# Altium PCB VESC_POWER_74mm.PcbDoc
Units mm, origin at the board's own origin, x right, y up, seen from the top; angles counter-clockwise.
Board outline 69 x 54 mm, 2 copper layers (Top Layer, Bottom Layer), stack 1.58 mm thick; 47 components, 16 nets, 109 pads, 0 vias.
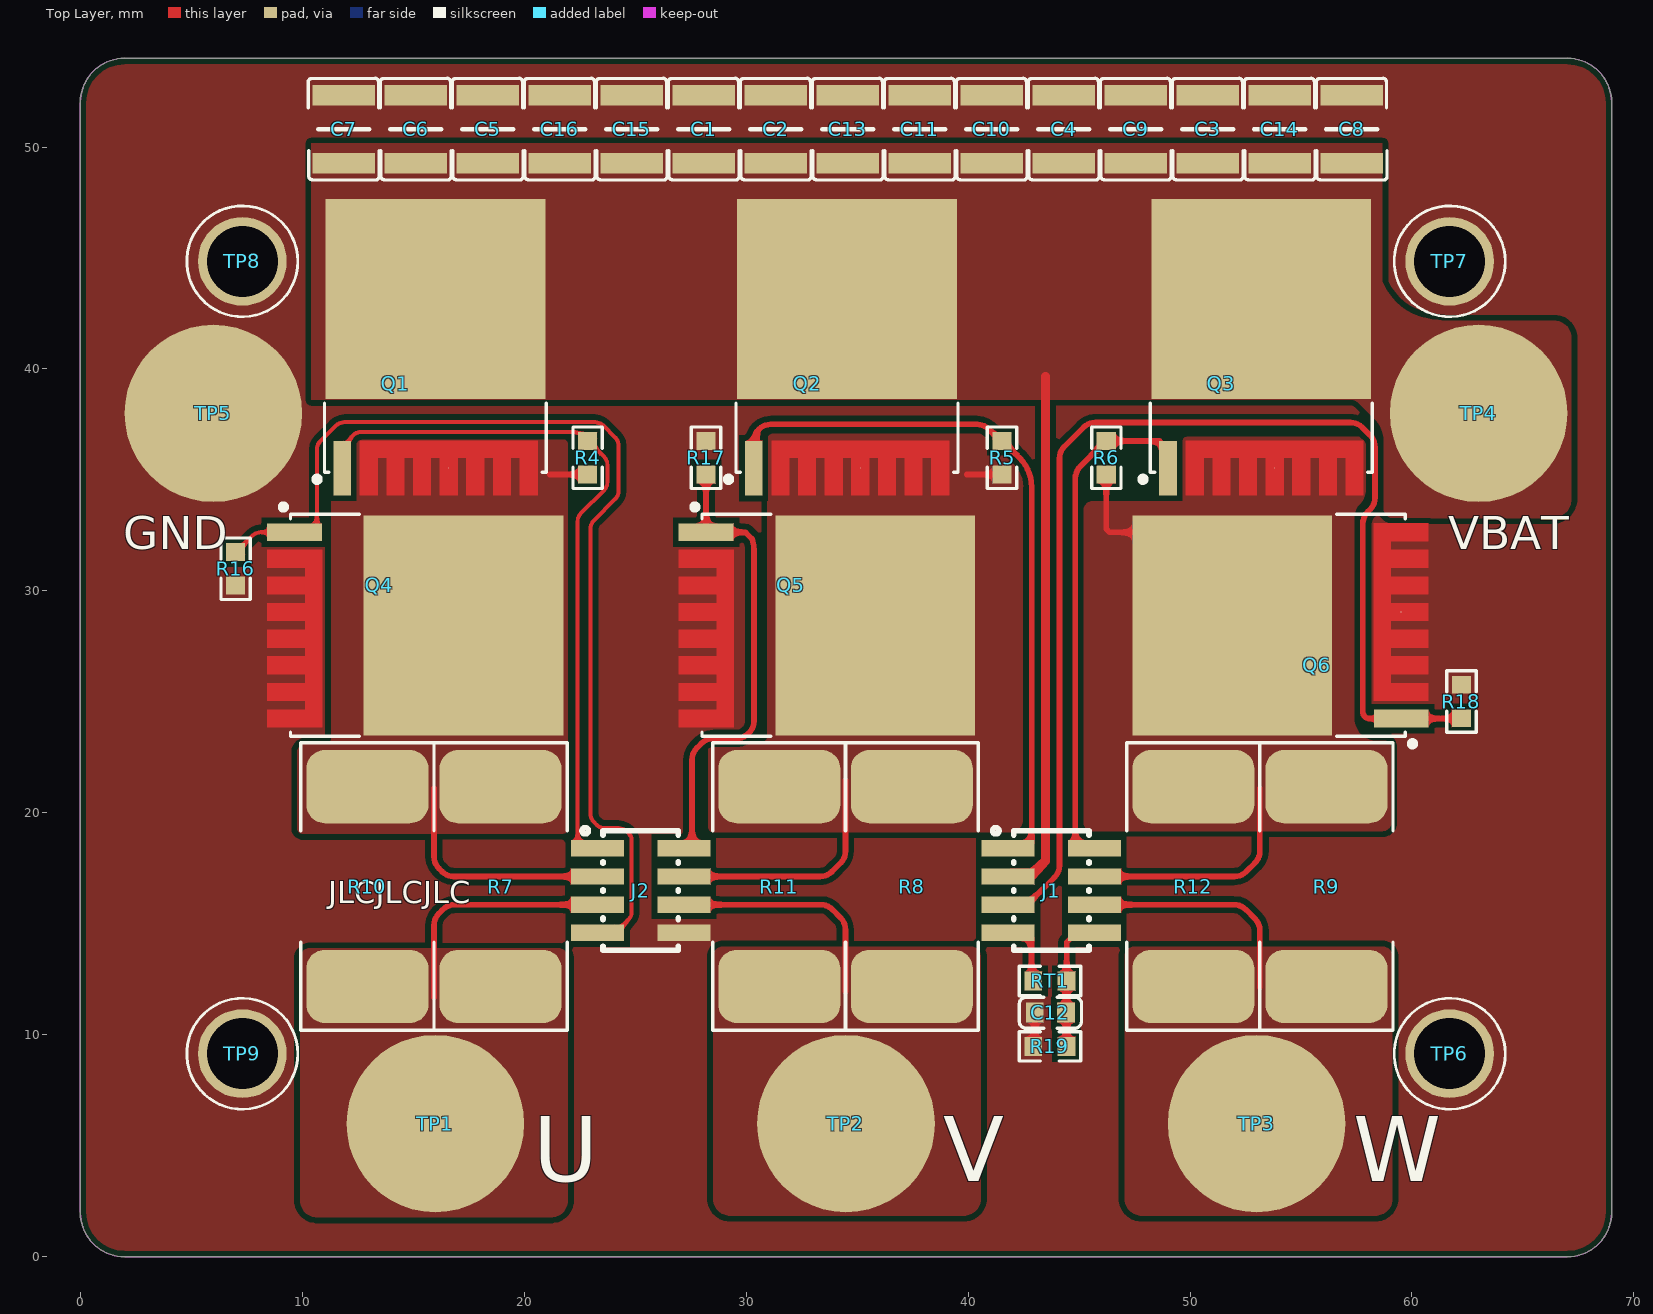
[diagram p0: Top Layer view]
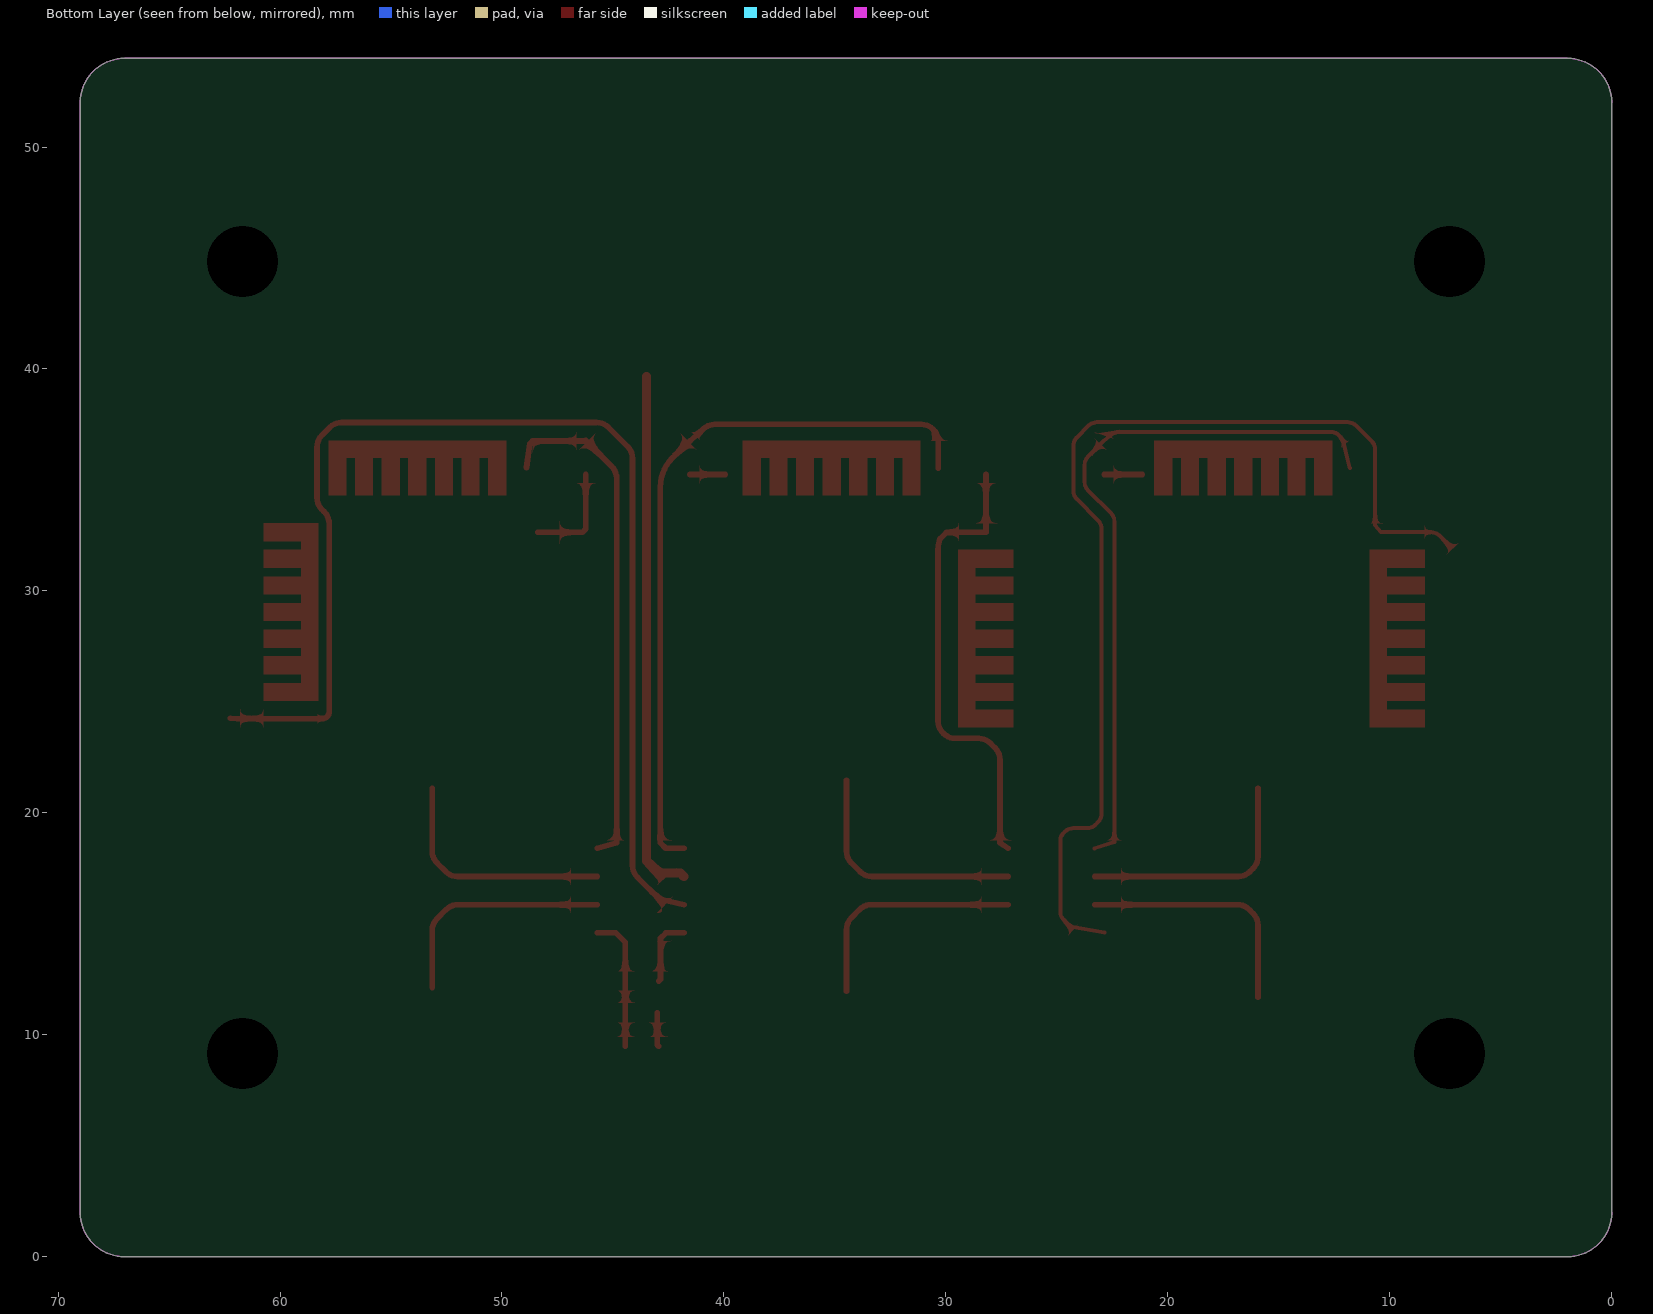
[diagram p1: Bottom Layer view, seen from below]
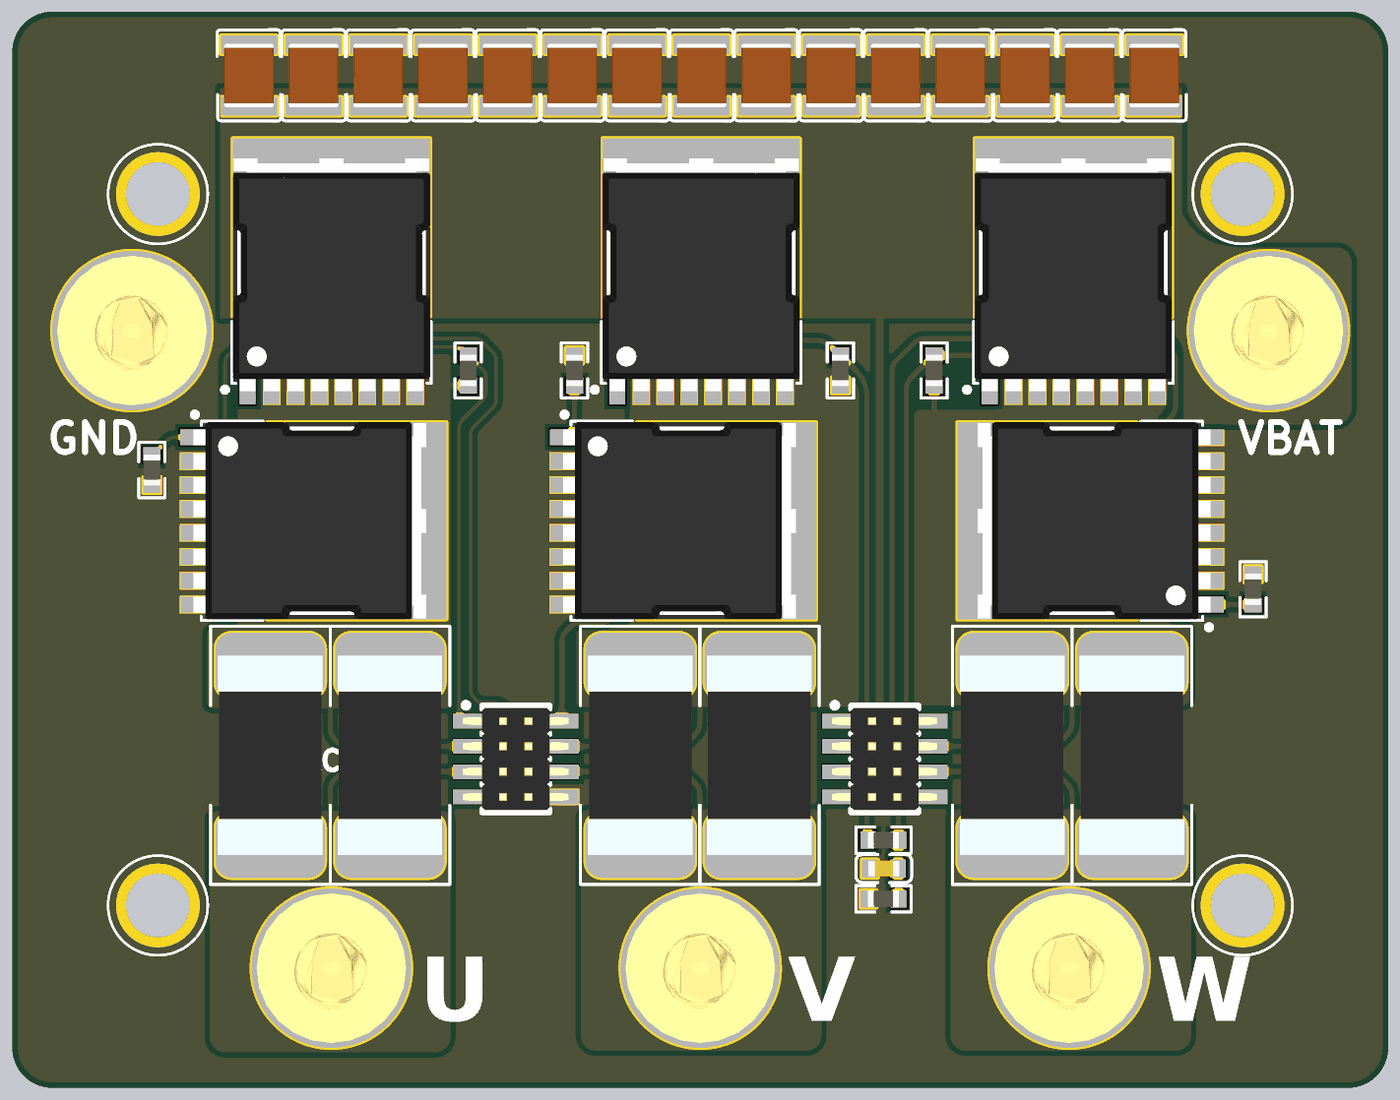
[diagram p2: 3D render of the assembled board from above, using the file's embedded part models]

## Layer stack, top to bottom
Top Solder: solder mask 0.0102, Solder Resist, Dk 3.5
Top Layer: signal copper 0.0356
Dielectric 1: dielectric 1.509, FR-4, Dk 4.8
Bottom Layer: signal copper 0.0356
Bottom Solder: solder mask 0.0102, Solder Resist, Dk 3.5

## Board outline
0,2 ccw(c2,2) 2,0 67,0 ccw(c67,2) 69,2 69,52 ccw(c67,52) 67,54 2,54 ccw(c2,52) 0,52

## Design rules (kind name [scope] priority, off if disabled: settings)
Clearance [All] p1: gap=0.254 ignorepadtopadclearanceinfootprint=FALSE
HoleSize [All] p1: absolutevalues=TRUE maxlimit=5 minlimit=0.025 maxpercent=80.000 minpercent=20.000
MinimumSolderMaskSliver [All] p1: minsoldermaskwidth=0.19
PolygonConnect [All] p1: connectstyle=Direct reliefconductorwidth=0.254 reliefentries=4 polygonreliefangle="90 Angle" airgapwidth=0.254
RoutingVias [All] p1: holewidth=0.711 width=1.27 viastyle="Through Hole" minholewidth=0.711 minwidth=1.27 maxholewidth=0.711 maxwidth=1.27
SilkToSilkClearance [All] p1: silktosilkclearance=0
SilkToSolderMaskClearance [IsPad] p1: minsilkscreentomaskgap=0.025 clearancetoexposedcopper=TRUE
SolderMaskExpansion [All] p1: expansion=0.102 istentingtop=FALSE
SupplyNets "Schematic Supply Nets_2" [InNet('GND')] p1: voltage=0.000
SupplyNets "Schematic Supply Nets_1" [InNet('3V3')] p2: voltage=0.000
SupplyNets "Schematic Supply Nets" [InNet('VIN')] p3: voltage=0.000
Width [All] p1: maxlimit=2.54 minlimit=0.152 preferedwidth=0.254
26 further rules are at their usual default settings.

## Components (designator, comment, footprint, x,y, rotation, side; value= is the part's Value field where it differs from the comment)
C1 "2.2uF/100V" CAPC3225X230N 28.084,50.8 r270 top
C2 "2.2uF/100V" CAPC3225X230N 31.327,50.8 r270 top
C3 "2.2uF/100V" CAPC3225X230N 50.79,50.8 r270 top
C4 "2.2uF/100V" CAPC3225X230N 44.302,50.8 r270 top
C5 "2.2uF/100V" CAPC3225X230N 18.352,50.8 r270 top
C6 "2.2uF/100V" CAPC3225X230N 15.109,50.8 r270 top
C7 "2.2uF/100V" CAPC3225X230N 11.865,50.8 r270 top
C8 "2.2uF/100V" CAPC3225X230N 57.277,50.8 r270 top
C9 "2.2uF/100V" CAPC3225X230N 47.546,50.8 r270 top
C10 "2.2uF/100V" CAPC3225X230N 41.058,50.8 r270 top
C11 "2.2uF/100V" CAPC3225X230N 37.815,50.8 r270 top
C12 "2.2uF/6.3V" C0603 43.708,10.998 r180 top
C13 "2.2uF/100V" CAPC3225X230N 34.571,50.8 r270 top
C14 "2.2uF/100V" CAPC3225X230N 54.033,50.8 r270 top
C15 "2.2uF/100V" CAPC3225X230N 24.84,50.8 r270 top
C16 "2.2uF/100V" CAPC3225X230N 21.596,50.8 r270 top
J1 "X6521WVS-2x04H-C60D74" HDR-SMD_8P-P1.27-V-M-C2-C4-LS5.3 43.75,16.5 r270 top
J2 "X6521WVS-2x04H-C60D74" HDR-SMD_8P-P1.27-V-M-C2-C4-LS5.3 25.25,16.5 r270 top
Q1 "NCEP023N10LL" TOLL 16.002,41 r90 top
Q2 "NCEP023N10LL" TOLL 34.544,41 r90 top
Q3 "NCEP023N10LL" TOLL 53.213,41 r90 top
Q4 "NCEP023N10LL" TOLL 15.122,28.448 r0 top
Q5 "NCEP023N10LL" TOLL 33.664,28.448 r0 top
Q6 "NCEP023N10LL" TOLL 54.05,28.448 r180 top
R4 "5.1K/1%" R0603 22.86,36 r90 top
R5 "5.1K/1%" R0603 41.529,36 r90 top
R6 "5.1K/1%" R0603 46.228,36 r90 top
R7 "1mR/1%" R3920 18.936,16.681 r90 top
R8 "1mR/1%" R3920 37.465,16.681 r90 top
R9 "1mR/1%" R3920 56.147,16.681 r90 top
R10 "1mR/1%" R3920 12.936,16.681 r90 top
R11 "1mR/1%" R3920 31.496,16.681 r90 top
R12 "1mR/1%" R3920 50.147,16.681 r90 top
R16 "5.1K/1%" R0603 7,31 r90 top
R17 "5.1K/1%" R0603 28.194,36 r270 top
R18 "5.1K/1%" R0603 62.23,25.019 r270 top
R19 "10K/1%" R0603 43.688,9.482 r0 top
RT1 "NTC" R0603 43.688,12.427 r0 top
TP1 "PHA" TP_8X8 16,6 r0 top
TP2 "PHB" TP_8X8 34.5,6 r0 top
TP3 "PHC" TP_8X8 53,6 r0 top
TP4 "GND" TP_8X8 63,38 r0 top
TP5 "VIN" TP_8X8 6,38 r0 top
TP6 "TEST POINT" HOLE-3.2MM_M 61.7,9.15 r0 top
TP7 "TEST POINT" HOLE-3.2MM_M 61.7,44.85 r0 top
TP8 "TEST POINT" HOLE-3.2MM_M 7.3,44.85 r0 top
TP9 "TEST POINT" HOLE-3.2MM_M 7.3,9.15 r0 top

## Footprints (in the part's own frame and the unit in brackets; to place one, negate y for a bottom-side part, rotate by r counter-clockwise, add the part's x,y. Pads: shape width x height; smd on the part's side, far side on the other; paste and mask are expansions set on the pad)
C0603 [mm] "C0603"
  rect 0.8x0.9 smd: 1(-0.7,0) 2(0.7,0)
  silkscreen extent -1.41,-0.7 1.4,0.7, body extent -0.8,-0.41 0.8,0.41, height 0.9
CAPC3225X230N [mm]
  rect 0.92x2.82 smd: 1(-1.54,0) 2(1.54,0)
  silkscreen extent -2.3,-1.6 2.28,1.6, body extent -1.6,-1.25 1.6,1.25, height 2.47
HDR-SMD_8P-P1.27-V-M-C2-C4-LS5.3 [mm]
  rect 0.74x2.4 smd paste+0 mask+0.05: 1(-1.905,-1.95) 2(-1.905,1.95) 3(-0.635,-1.95) 4(-0.635,1.95) 5(0.635,-1.95) 6(0.635,1.95) 7(1.905,-1.95) 8(1.905,1.95)
  silkscreen extent -2.84,-2.64 2.69,1.7, body extent -2.54,-2.65 2.54,2.65, height 5.5
HOLE-3.2MM_M [mm]
  round 4 / inner round 4 / far side round 0 hole 3.2: 1(0,0)
  silkscreen extent -2.5,-2.5 2.5,2.5
R0603 [mm] "R0603"
  rect 0.806x0.864 smd: 1(-0.753,0) 2(0.753,0)
  silkscreen extent -1.38,-0.66 1.39,0.66, body extent -0.79,-0.43 0.79,0.43, height 0.5
R3920 [mm] "R3920"
  rrect50% 3.3x5.5 smd: 1(-4.5,0) 2(4.5,0)
  silkscreen extent -6.48,-3 6.48,3, body extent -5,-2.63 5,2.63, height 1.37
TOLL [mm] "TOLL"
  rect 2.463x0.8 smd: 1(-5.469,4.2)
  rect 9x9.9 smd: 2(2.15,0)
  oct 0.025x0.025 smd: 3(-5.46,-0.6)
  round 0.025 smd: 3(-5.46,-0.6)
  Top Layer region: -6.691,3.4 -4.228,3.4 -4.228,-4.6 -6.691,-4.6 -6.691,-3.8 -4.991,-3.8 -4.991,-3.4 -6.691,-3.4 -6.691,-2.6 -4.991,-2.6 -4.991,-2.2 -6.691,-2.2 -6.691,-1.4 -4.991,-1.4 -4.991,-1 -6.691,-1 -6.691,-0.2 -4.991,-0.2 -4.991,0.2 -6.691,0.2 -6.691,1 -4.991,1 -4.991,1.4 -6.691,1.4 -6.691,2.2 -4.991,2.2 -4.991,2.6 -6.691,2.6
  silkscreen extent -6.1,-5 -2.55,5.46, body extent -6.04,-4.95 5.63,4.95, height 2.3
TP_8X8 [mm] "TP_8X8"
  round 8 smd: 1(0,0)
  body extent -3.75,-3.75 3.74,3.75, height 23

## Part data
C1 C2 C3 C4 C5 C6 C7 C8 C9 C10 C11 C12 C13 C14 C15 C16: library part "CAP NP"
  C1 C2 C3 C4 C5 C6 C7 C8 C9 C10 C11 C13 C14 C15 C16: PCB Footprint=C1206
  C12: PCB Footprint=C0603
J1 J2: Color=黑色, Current Rating (Max)=3A, JLCPCB Part Class="Extended Part", LCSC Part Name="2x4P 间距:2.54mm 方针", Manufacturer="XKB Connection(中国星坤)", Operating Temperature Range=-40℃~+105℃, Soldering Temperature(Max)=260℃, Voltage Rating (Max)=250V, Add into BOM=yes, Circluar Pins/Square Pins=方针, Contact Material=黄铜, Contact Plating=金, Convert to PCB=yes, Datasheet=https://atta.szlcsc.com/upload/public/pdf/source/20211009/E3239EE5247E6BAFECB8B74A4FCF9AB8.pdf, Device=X6521WVS-2x04H-C60D74, Insulation Height=2.5mm, Length of End Connection Pin=-, Length of Mating Pin=-, Manufacturer Part=X6521WVS-2x04H-C60D74, Mounting Type=-, Number of Pins=8P, Number of Rows=双排, Pin Structure=2x4P, Pitch=2.54mm, Row Spacing=2.54mm, Supplier=LCSC, Supplier Footprint=SMD,P=2.54mm, Supplier Part=C780053, Symbol=X6521WVS-2*04H-C60D74
Q1 Q2 Q3 Q4 Q5 Q6: library part "MOSFET N", PCB Footprint=TOLL
R4 R5 R6 R7 R8 R9 R10 R11 R12 R16 R17 R18 R19: library part RESISTOR
  R4 R5 R6 R16 R17 R18 R19: PCB Footprint=R0603
  R7 R8 R9 R10 R11 R12: PCB Footprint=R3920
TP1 TP2 TP3 TP4 TP5: library part "TEST POINT", PCB Footprint=TP_8x8
RT1: PCB Footprint=R0603

## Nets (pads, with @x,y where several pads share a name; then routed paths per layer and width w, separated by ;. In a path a pad name is that pad's centre, name@x,y a point inside that pad or via, vN(x,y) a via of type N, cw(c..) or ccw(c..) an arc to the next point about the centre after c; other vN are vias at no path point)
3V3: J1.7 RT1.1 | length 3.1
  Top Layer w0.254: J1.7 42.613,14.595 42.856,14.352 42.856,12.506 RT1.1
ADC_TEMP: C12.1 J1.8 R19.2 RT1.2 | length 6.1
  Top Layer w0.254: R19.2 RT1.2 44.441,14.166 44.87,14.595 J1.8
GHA: J2.1 Q1.1 R4.2 | length 32.2
  Top Layer w0.178: Q1.1 12.085,36.674 12.091,36.699 cw(c12.61,36.57) 12.231,36.947 12.295,37.011 cw(c12.673,36.633) 12.673,37.167 22.196,37.167 cw(c22.196,36.633) 22.446,37.105 22.517,37.067 22.889,36.753 23.203,36.439 23.593,36.049 cw(c23.215,35.672) 23.749,35.672 23.749,34.911 cw(c23.215,34.911) 23.593,34.534 22.565,33.506 ccw(c22.943,33.128) 22.409,33.128 22.409,18.686 J2.1
GHB: J1.1 Q2.1 R5.2 | length 32.8
  Top Layer w0.254: Q2.1 30.344,36.74 cw(c31.106,36.74) 31.106,37.502 40.407,37.502 cw(c40.407,36.74) 40.919,37.305 41.224,37.029 R5.2 41.834,36.477 42.322,35.989 cw(c41.015,34.683) 42.862,34.683 42.862,18.648 42.619,18.405 J1.1
GHC: J1.2 Q3.1 R6.2 | length 23.2
  Top Layer w0.254: J1.2 44.831,18.648 44.831,35.069 cw(c45.593,35.069) 45.054,35.608 R6.2@46.228,36.782 ; R6.2 48.622,36.753 48.74,36.635 Q3.1@48.895,35.56
GLA: J2.7 Q4.1 R16.2 | length 47.1
  Top Layer w0.178: R16.2@7.28,32.004 7.769,32.493 cw(c8.145,32.115) 8.145,32.648 10.391,32.648 10.664,32.959 10.664,36.37 cw(c11.197,36.37) 10.819,36.746 11.52,37.446 cw(c11.896,37.068) 11.896,37.602 23.192,37.602 cw(c23.192,37.068) 23.569,37.446 24.101,36.913 cw(c23.724,36.537) 24.257,36.537 24.257,34.511 cw(c23.724,34.511) 24.102,34.135 23.142,33.175 ccw(c23.52,32.799) 22.987,32.799 22.987,19.962 ccw(c23.52,19.962) 23.142,19.586 23.261,19.467 ccw(c23.637,19.846) 23.637,19.313 24.259,19.313 cw(c24.259,18.779) 24.636,19.157 24.687,19.105 cw(c24.31,18.729) 24.784,18.973 24.805,18.932 cw(c24.5,18.775) 24.843,18.775 24.843,15.495 cw(c24.5,15.495) 24.773,15.288 24.735,15.237 cw(c24.31,15.559) 24.705,15.201 24.411,14.876 J2.7@22.86,14.605
GLB: J2.2 Q5.1 R17.2 | length 20.9
  Top Layer w0.254: J2.2 27.559,18.648 27.559,22.39 cw(c28.321,22.39) 27.782,22.929 27.987,23.134 cw(c28.525,22.595) 28.525,23.357 29.567,23.357 ccw(c29.567,24.119) 30.106,23.58 30.13,23.604 ccw(c29.591,24.142) 30.353,24.142 30.353,31.877 ccw(c29.591,31.877) 30.336,32.037 30.271,32.34 29.972,32.639 Q5.1@28.194,32.639 ; Q5.1 R17.2
GLC: J1.5 Q6.1 R18.2 | length 53.8
  Top Layer w0.254: J1.5 42.873,16.108 42.905,16.108 43.894,17.097 ccw(c43.355,17.635) 44.117,17.635 44.117,35.966 cw(c44.879,35.966) 44.339,36.504 45.204,37.369 cw(c45.743,36.83) 45.743,37.592 57.218,37.592 cw(c57.218,36.83) 57.756,37.369 58.113,37.013 cw(c57.574,36.474) 58.336,36.474 58.336,34.212 cw(c57.574,34.212) 58.113,33.673 58.008,33.569 ccw(c58.547,33.03) 57.785,33.03 57.785,24.552 ccw(c58.089,24.552) 58.089,24.248 61.925,24.248 R18.2@62.23,24.257
GND: C1.1 C2.1 C3.1 C4.1 C5.1 C6.1 C7.1 C8.1 C9.1 C10.1 C11.1 C12.2 C13.1 C14.1 C15.1 C16.1 J2.8 Q4.3 Q5.3 Q6.3 R16.1 R17.1 R18.1 R19.1 TP5.1 TP6.1 TP7.1 TP8.1 TP9.1 | length 1.5
  Top Layer w0.254: R19.1 43.008,9.555 C12.2
PHA: J2.5 R7.1 R10.1 TP1.1 | length 11.1
  Top Layer w0.254: 15.938,11.699 15.938,14.935 cw(c16.7,14.935) 16.161,15.474 16.33,15.642 cw(c16.868,15.103) 16.868,15.865 J2.5
PHB: J2.6 R8.1 R11.1 TP2.1 | length 10.6
  Top Layer w0.254: J2.6 33.349,15.865 cw(c33.349,15.103) 33.888,15.642 34.256,15.274 cw(c33.717,14.735) 34.479,14.735 34.479,11.961
PHC: J1.6 R9.1 R12.1 TP3.1 | length 10.6
  Top Layer w0.254: J1.6 51.976,15.865 cw(c51.976,15.103) 52.514,15.642 52.924,15.232 cw(c52.385,14.694) 53.147,14.694 53.147,12.131
SHA: J2.3 Q1.3 Q4.2 R4.1 R7.2 R10.2 | length 12.6
  Top Layer w0.254: 15.938,21.109 15.938,18.032 ccw(c16.7,18.032) 16.161,17.494 16.297,17.358 ccw(c16.836,17.897) 16.836,17.135 J2.3 ; 21.15,35.247 R4.1
SHB: J2.4 Q2.3 Q5.2 R5.1 R8.2 R11.2 | length 12.6
  Top Layer w0.254: J2.4 33.329,17.135 ccw(c33.329,17.897) 33.868,17.358 34.257,17.747 ccw(c33.718,18.286) 34.48,18.286 34.48,21.463 ; 39.937,35.247 R5.1
SHC: J1.4 Q3.3 Q6.2 R6.1 R9.2 R12.2 | length 15.5
  Top Layer w0.254: J1.4 51.997,17.135 ccw(c51.997,17.897) 52.535,17.358 52.924,17.747 ccw(c52.385,18.285) 53.147,18.285 53.147,21.108 ; R6.1 46.228,32.788 46.377,32.639 Q6.2@48.387,32.639
VIN: C1.2 C2.2 C3.2 C4.2 C5.2 C6.2 C7.2 C8.2 C9.2 C10.2 C11.2 C13.2 C14.2 C15.2 C16.2 J1.3 Q1.2 Q2.2 Q3.2 TP4.1 | length 23.8
  Top Layer w0.406: J1.3 41.967,17.302 42.957,17.302 43.497,17.842 43.497,39.662

## Polygon pours and split planes (outlines as drawn)
GND on Top Layer "GND_L01_P019" (solid, pour order 19): 0,2 ccw(c2,2) 2,0 67,0 ccw(c67,2) 69,2 69,52 ccw(c67,52) 67,54 2,54 ccw(c2,52) 0,52
SHB on Top Layer "SHB_L01_P011" (solid, pour order 11): 31.203,37.084 41.826,37.084 cw(c41.826,36.429) 42.481,36.429 42.481,19.748 cw(c41.851,19.748) 41.851,19.118 28.546,19.118 cw(c28.546,19.371) 28.292,19.372 28.292,22.807 cw(c28.667,22.807) 28.667,23.182 30.705,23.182 ccw(c30.705,23.436) 30.959,23.436 30.959,36.84 cw(c31.203,36.84)
SHC on Top Layer "SHC_L01_P018" (solid, pour order 18): 57.912,36.703 57.912,34.597 cw(c56.866,34.596) 57.605,33.856 ccw(c58.091,33.37) 57.404,33.37 57.404,24.257 ccw(c58.42,24.257) 58.42,23.241 58.801,23.241 cw(c58.801,22.987) 59.055,22.987 59.055,19.558 cw(c58.674,19.558) 58.674,19.177 45.593,19.177 cw(c45.593,19.558) 45.212,19.558 45.212,33.655 cw(c45.593,33.655) 45.593,34.036 49.276,34.036 ccw(c49.276,34.417) 49.657,34.417 49.657,36.703 cw(c49.911,36.703) 49.911,36.957 57.658,36.957 cw(c57.658,36.703)
SHA on Top Layer "SHA_L01_P010" (solid, pour order 10): 11.303,37.016 21.657,37.016 cw(c21.658,36.703) 21.971,36.703 21.971,19.314 cw(c21.707,19.314) 21.707,19.05 10.033,19.05 cw(c10.033,19.304) 9.779,19.304 9.779,22.739 cw(c10.154,22.739) 10.154,23.114 11.049,23.114 ccw(c11.049,23.368) 11.303,23.368
VIN on Top Layer "VIN_L01_P009" (solid, pour order 9): 67.183,34.163 67.183,41.402 ccw(c66.415,41.402) 66.415,42.17 61.589,42.17 cw(c61.934,48.106) 60.487,42.339 cw(c61.133,44.914) 58.645,43.989 cw(c64.723,46.249) 58.25,45.853 55.505,45.853 55.378,45.726 55.378,39.122 55.67,38.831 ccw(c56.193,39.355) 56.193,38.614 57.209,38.614 cw(c57.209,38.029) 57.623,38.443 58.329,37.737 cw(c57.362,36.77) 58.73,36.77 58.73,33.726 ccw(c59.176,33.726) 59.176,33.28 66.3,33.28 ccw(c66.3,34.163)
PHC on Top Layer "PHC_L01_P017" (solid, pour order 17): 47.483,13.97 58.689,13.97 cw(c58.689,13.54) 59.118,13.54 59.118,2.618 cw(c58.357,2.618) 58.356,1.856 47.816,1.856 cw(c47.816,2.618) 47.053,2.618 47.053,13.54 cw(c47.483,13.54)
PHB on Top Layer "PHB_L01_P016" (solid, pour order 16): 28.941,13.97 40.147,13.97 cw(c40.147,13.54) 40.576,13.54 40.576,2.618 cw(c39.815,2.618) 39.814,1.856 29.273,1.856 cw(c29.274,2.618) 28.511,2.618 28.511,13.54 cw(c28.941,13.54)
PHA on Top Layer "PHA_L01_P015" (solid, pour order 15): 10.336,13.892 21.541,13.892 cw(c21.541,13.462) 21.971,13.462 21.971,2.54 cw(c21.209,2.54) 21.209,1.778 10.668,1.778 cw(c10.668,2.54) 9.906,2.54 9.906,13.462 cw(c10.336,13.462)
VIN on Top Layer "VIN_L01_P003" (solid, pour order 3): 10.419,38.608 10.419,50.165 58.669,50.165 58.669,38.608

## Keep-outs
Keep-Out Layer:
  the board outline again, w0.025

## Other copper
Top Layer:
  pour cut-out: 46.438,36.297 48.319,36.251 48.353,34.385 46.634,34.38 46.644,34.568 46.672,35.75 46.164,35.75 46.164,36.03

## Silkscreen, mask and mechanical layers (free items; w line width, h text height)
Top Overlay:
  text "GND" at 1.938,31.889 h1.5
  text "VBAT" at 61.64,31.889 h1.5
  text "JLCJLCJLC" at 11.176,15.938 h1
  text "U" at 20.399,2.442 h5
  text "V" at 38.887,2.442 h5
  text "W" at 57.354,2.442 h5
Mechanical 1:
  circle w0.127: c7.3,44.85 r1.5
  circle w0.127: c7.3,9.15 r1.5
  circle w0.127: c61.7,9.15 r1.5
  circle w0.127: c61.7,44.85 r1.5
  lines w0.127: 67,53.944 cw(c67,51.944) 69,51.944 69,1.944 ; 67,54 2,54 ccw(c2,52) 0,52 0,2 ccw(c2,2) 2,0 67,0 ccw(c67,2) 69,2
Mechanical 6:
  lines w0.025: -0.635,0 0.635,0 ; 0,-0.635 0,0.635

## Text inside footprints (layer, text, board x,y; h text height)
C12: Mechanical 8 "1" at 44.662,10.998 h0.64 r180; Mechanical 8 "2" at 43.262,10.998 h0.64 r180
Q1: Mechanical 8 "1" at 11.594,35.15 h0.64 r90; Mechanical 8 "3" at 16.394,35.05 h0.64 r90; Mechanical 8 "2" at 16.764,43.15 h0.64 r180
Q2: Mechanical 8 "2" at 35.306,43.15 h0.64 r180; Mechanical 8 "3" at 34.936,35.05 h0.64 r90; Mechanical 8 "1" at 30.136,35.15 h0.64 r90
Q3: Mechanical 8 "1" at 48.805,35.15 h0.64 r90; Mechanical 8 "3" at 53.605,35.05 h0.64 r90; Mechanical 8 "2" at 53.975,43.15 h0.64 r180
Q4: Mechanical 8 "2" at 17.272,27.686 h0.64 r90; Mechanical 8 "3" at 9.172,28.056 h0.64; Mechanical 8 "1" at 9.272,32.856 h0.64
Q5: Mechanical 8 "1" at 27.814,32.856 h0.64; Mechanical 8 "3" at 27.714,28.056 h0.64; Mechanical 8 "2" at 35.814,27.686 h0.64 r90
Q6: Mechanical 8 "2" at 51.9,29.21 h0.64 r270; Mechanical 8 "3" at 60,28.84 h0.64 r180; Mechanical 8 "1" at 59.9,24.04 h0.64 r180
R4: Mechanical 8 "1" at 23.06,35.908 h0.64 r90; Mechanical 8 "2" at 23.06,37.508 h0.64 r90
R5: Mechanical 8 "2" at 41.729,37.508 h0.64 r90; Mechanical 8 "1" at 41.729,35.908 h0.64 r90
R6: Mechanical 8 "2" at 46.428,37.508 h0.64 r90; Mechanical 8 "1" at 46.428,35.908 h0.64 r90
R7: Mechanical 8 "1" at 18.528,12.381 h0.64 r90; Mechanical 8 "2" at 18.528,21.381 h0.64 r90
R8: Mechanical 8 "2" at 37.057,21.381 h0.64 r90; Mechanical 8 "1" at 37.057,12.381 h0.64 r90
R9: Mechanical 8 "2" at 55.739,21.381 h0.64 r90; Mechanical 8 "1" at 55.739,12.381 h0.64 r90
R10: Mechanical 8 "2" at 12.528,21.381 h0.64 r90; Mechanical 8 "1" at 12.528,12.381 h0.64 r90
R11: Mechanical 8 "1" at 31.088,12.381 h0.64 r90; Mechanical 8 "2" at 31.088,21.381 h0.64 r90
R12: Mechanical 8 "1" at 49.739,12.381 h0.64 r90; Mechanical 8 "2" at 49.739,21.381 h0.64 r90
R16: Mechanical 8 "2" at 7.2,32.508 h0.64 r90; Mechanical 8 "1" at 7.2,30.908 h0.64 r90
R17: Mechanical 8 "2" at 27.994,34.492 h0.64 r270; Mechanical 8 "1" at 27.994,36.092 h0.64 r270
R18: Mechanical 8 "2" at 62.03,23.511 h0.64 r270; Mechanical 8 "1" at 62.03,25.111 h0.64 r270
R19: Mechanical 8 "1" at 43.596,9.282 h0.64; Mechanical 8 "2" at 45.196,9.282 h0.64
RT1: Mechanical 8 "1" at 43.596,12.227 h0.64; Mechanical 8 "2" at 45.196,12.227 h0.64
TP1: Mechanical 8 "1" at 14.222,6 h0.64
TP2: Mechanical 8 "1" at 32.722,6 h0.64
TP3: Mechanical 8 "1" at 51.222,6 h0.64
TP4: Mechanical 8 "1" at 61.222,38 h0.64
TP5: Mechanical 8 "1" at 4.222,38 h0.64